# Altium PCB pcb_circuit_de_puissance.PcbDoc
Units mm, origin at the board's own origin, x right, y up, seen from the top; angles counter-clockwise.
Board outline 123 x 48 mm, 2 copper layers (Top Layer, Bottom Layer); 24 components, 18 nets, 80 pads, 73 vias.
Unrouted connection lines stored in the file: 4.
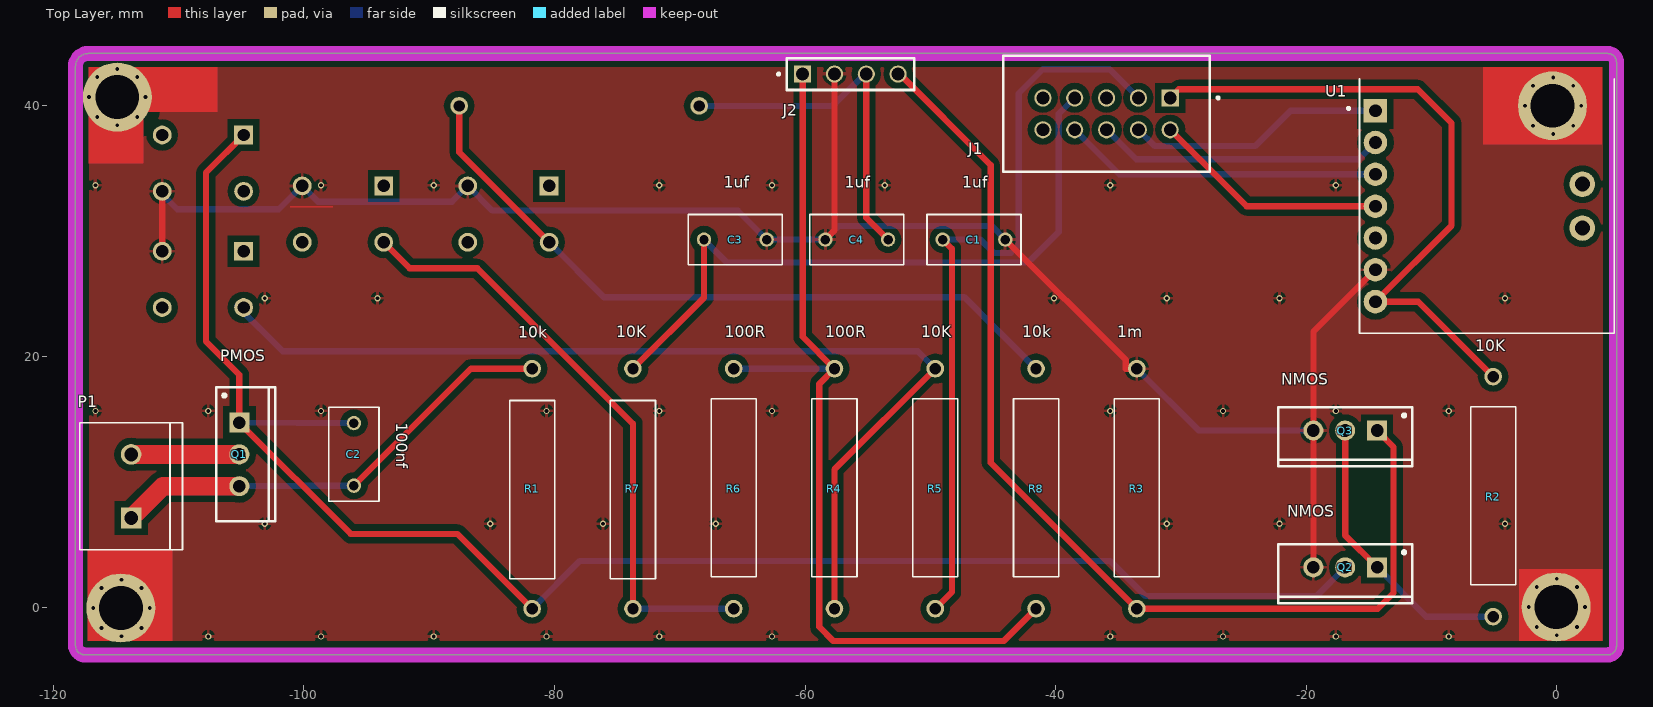
[diagram p0: Top Layer view]
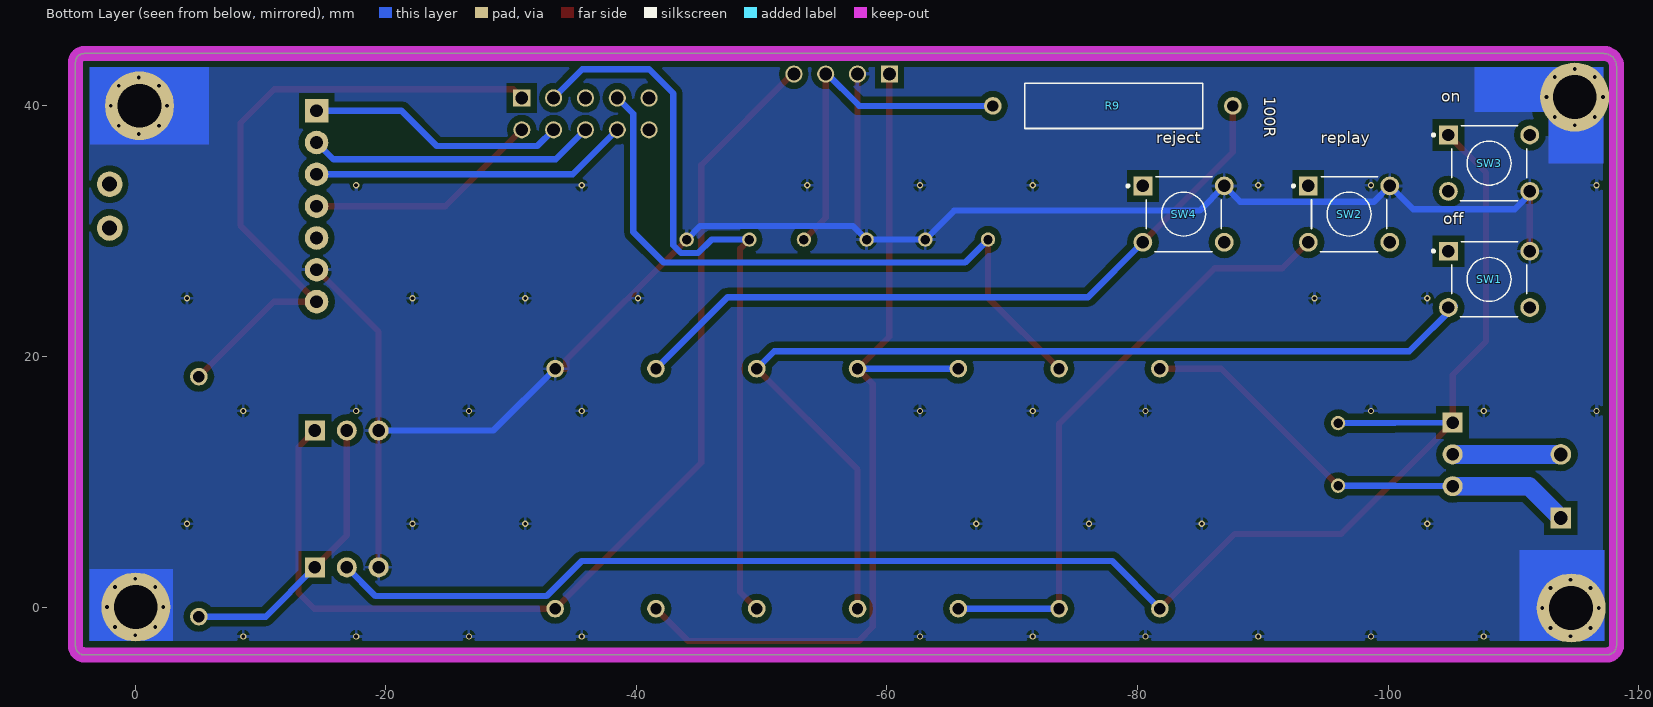
[diagram p1: Bottom Layer view, seen from below]
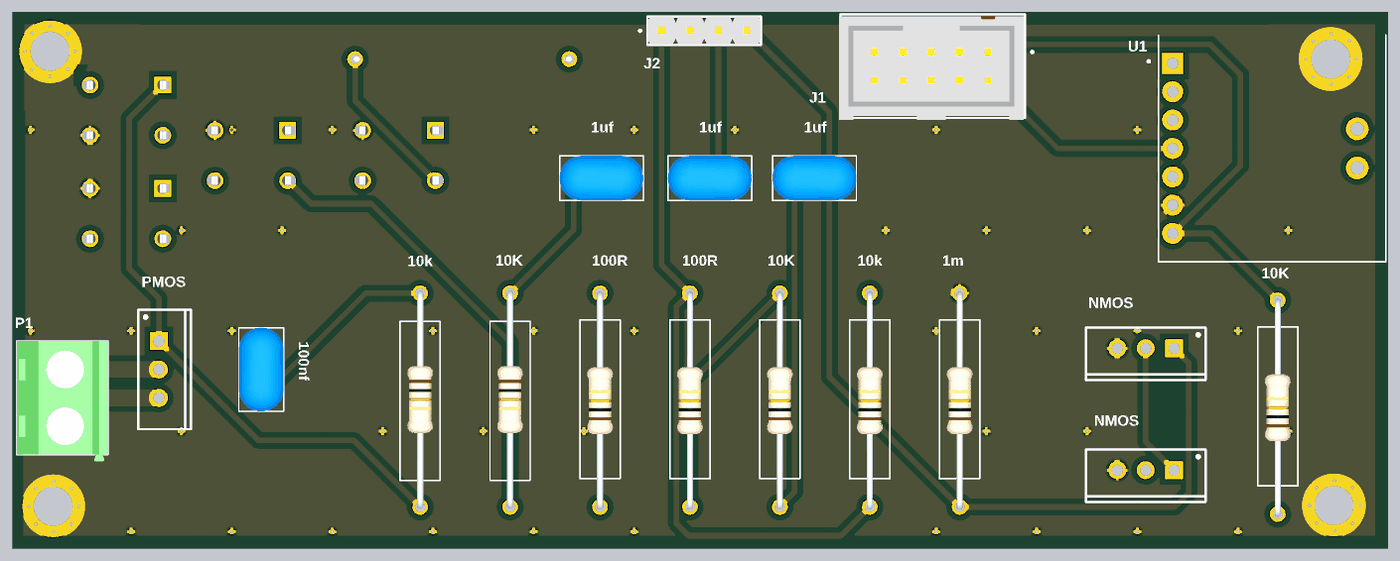
[diagram p2: 3D render of the assembled board from above, using the file's embedded part models]
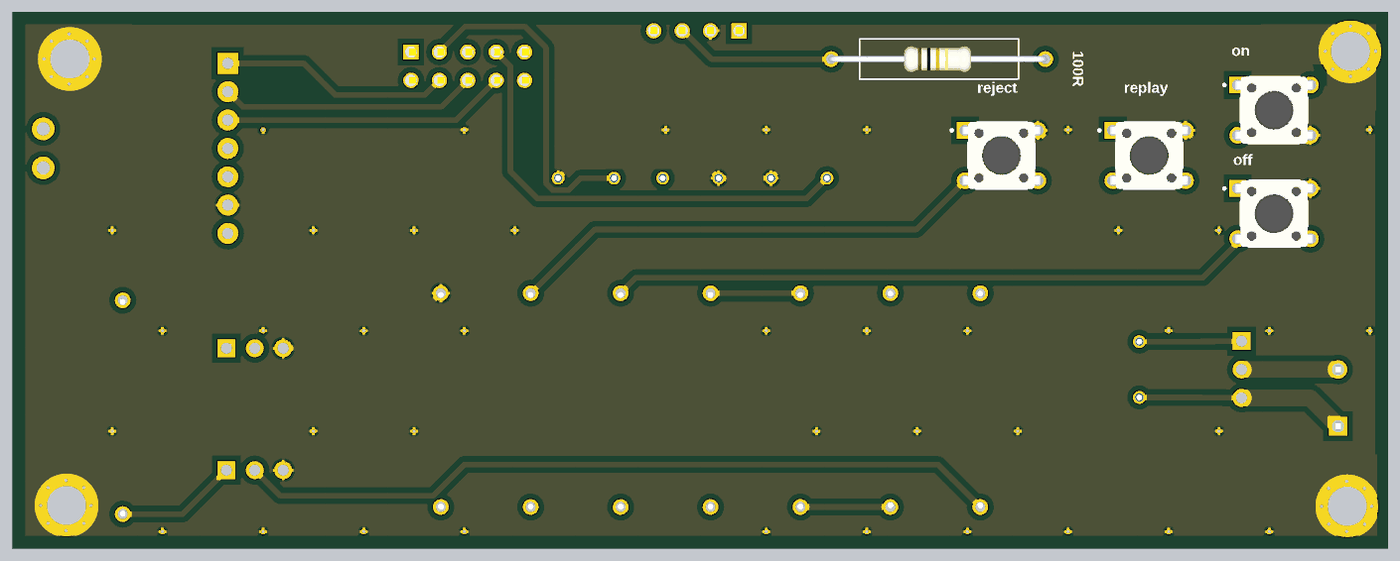
[diagram p3: 3D render of the assembled board from below, using the file's embedded part models]

## Layer stack, top to bottom
Top Solder: solder mask 0.0102, Solder Resist, Dk 3.5
Top Layer: signal copper 0.0356
Dielectric 1: dielectric 0.32, FR-4, Dk 4.8
Bottom Layer: signal copper 0.0356
Bottom Solder: solder mask 0.0102, Solder Resist, Dk 3.5

## Board outline
-118.239,-3.057 ccw(c-117.477,-3.057) -117.477,-3.819 4.062,-3.819 ccw(c4.062,-3.12) 4.761,-3.12 4.761,43.488 ccw(c4.065,43.485) 4.062,44.181 -117.229,44.181 ccw(c-117.229,43.171) -118.239,43.171

## Design rules (kind name [scope] priority, off if disabled: settings)
Clearance Clearance_2 [InNamedPolygon('bottom_polygon')] p1: gap=0.5 ignorepadtopadclearanceinfootprint=FALSE
Clearance Clearance_1 [InNamedPolygon('NONET_L01_P006')] p2: gap=0.5 ignorepadtopadclearanceinfootprint=FALSE
Clearance [InNamedPolygon('NONET_L01_P000')] p3: gap=0.5 ignorepadtopadclearanceinfootprint=FALSE
HoleSize [All] p1: absolutevalues=TRUE maxlimit=3.6 minlimit=0.025 maxpercent=80.000 minpercent=20.000
PolygonConnect [All] p1: connectstyle=Relief reliefconductorwidth=0.254 reliefentries=4 polygonreliefangle="90 Angle" airgapwidth=0.254
RoutingVias [All] p1: holewidth=0.711 width=0.8 viastyle="Through Hole" minholewidth=0.127 minwidth=0.3 maxholewidth=6 maxwidth=8
SilkToSolderMaskClearance [IsPad] p1: minsilkscreentomaskgap=0.23 clearancetoexposedcopper=TRUE
SolderMaskExpansion [All] p1: expansion=0.102 istentingtop=FALSE
UnRoutedNet [All] p1: checkbadconnections=TRUE
Width [All] p1: maxlimit=3 minlimit=0.5 preferedwidth=0.5
27 further rules are at their usual default settings.

## Classes and differential pairs
component class Sheet-circuit_de_puissance: C1 C2 C3 C4 J1 J2 P1 Q1 Q2 Q3 R1 R2 R3 R4 R5 R7 R8 R9 SW1 SW2 SW3 SW4

## Components (designator, comment, footprint, x,y, rotation, side; value= is the part's Value field where it differs from the comment)
C1 "1uf" cap -46.524,29.328 r0 top
C2 "100nf" cap -96.014,12.183 r90 top
C3 "1uf" cap -65.574,29.328 r180 top
C4 "1uf" cap -55.882,29.328 r0 top
J1 "hedear_10p" hedear10p -30.863,40.631 r180 top
J2 "hedear_4p" hedaer_4p_pcb -56.39,42.536 r180 top
P1 "hedear_2p_screw" hedear_2p_screw -113.794,9.643 r90 top
Q1 "PMOS" TO-220AB -105.158,12.183 r270 top
Q2 "NMOS" TO-220AB -16.893,3.166 r180 top
Q3 "NMOS" TO-220AB -16.893,14.088 r180 top
R1 "10k" "resistance - less_top_overlay"#1 -81.79,9.496 r270 top
R2 "10K" "resistance - less_top_overlay"#1 -5.082,8.754 r90 top value=10k
R3 "1m" "resistance - less_top_overlay"#2 -33.53,9.389 r90 top
R4 "100R" "resistance - less_top_overlay"#2 -57.66,9.389 r90 top value=10k
R5 "10K" "resistance - less_top_overlay"#2 -49.617,9.389 r90 top value=100ohm
R6 "100R" "resistance - less_top_overlay"#1 -65.703,9.389 r90 top value=10k
R7 "10K" "resistance - less_top_overlay"#3 -73.747,9.496 r270 top value=100ohm
R8 "10k" "resistance - less_top_overlay"#4 -41.573,9.389 r90 top
R9 "100R" "resistance - less_top_overlay"#1 -77.98,39.996 r180 bottom value=100ohm
SW1 "off" push_button_pcb -108.068,26.153 r180 bottom
SW2 "replay" push_button_pcb -96.892,31.36 r180 bottom
SW3 "on" push_button_pcb -108.068,35.424 r180 bottom
SW4 "reject" push_button_pcb -83.684,31.36 r180 bottom
U1 "DEV14809" MODULEson_DEV14809 -5.59,31.995 r0 top

## Footprints (in the part's own frame and the unit in brackets; to place one, negate y for a bottom-side part, rotate by r counter-clockwise, add the part's x,y. Pads: shape width x height; smd on the part's side, far side on the other; paste and mask are expansions set on the pad)
cap [mm]
  round 1.15 hole 0.75: 1(-2.5,0) 2(2.5,0)
  silkscreen extent -3.75,-2 3.75,2, body extent -3.75,-2 3.75,2, height 23.5
hedaer_4p_pcb [mm]
  rect 1.37x1.37 / inner round 1.37 / far side rect 1.37x1.37 hole 1.02: 01(3.81,0)
  round 1.37 hole 1.02: 02(1.27,0) 03(-1.27,0) 04(-3.81,0)
  silkscreen extent -5.08,-1.27 5.83,1.27, body extent -5.08,-1.27 5.08,1.22, height 6.22
hedear10p [mm]
  rect 1.37x1.37 hole 1.02: 01(0,0)
  round 1.37 hole 1.02: 02(0,2.54) 03(2.54,0) 04(2.54,2.54) 05(5.08,0) 06(5.08,2.54) 07(7.62,0) 08(7.62,2.54) 09(10.16,0) 10(10.16,2.54)
  silkscreen extent -3.93,-3.36 13.33,5.9, body extent -3.05,-3.18 13.46,6.1, height 8.89
hedear_2p_screw [mm]
  rect 1.65x1.65 / inner round 1.65 / far side rect 1.65x1.65 hole 1.1: 1(-2.54,0)
  round 1.65 hole 1.1: 2(2.54,0)
  silkscreen extent -5.08,-4.1 5.08,4.1, body extent -5.68,-4.1 5.08,4.1, height 10
MODULEson_DEV14809 [mil]
  round 80 hole 47.24: J1_1(300,-68.9) J1_2(300,68.9)
  rect 74x74 / inner round 74 / far side rect 74x74 hole 40: J2_1(-350,300)
  round 74 hole 40: J2_2(-350,200) J2_3(-350,100) J2_4(-350,0) J2_5(-350,-100) J2_6(-350,-200) J2_7(-350,-300)
  silkscreen extent -438,-400 400,400
push_button_pcb [mm]
  rect 1.498x1.498 / inner round 1.498 / far side rect 1.498x1.498 hole 0.99: 1(-3.25,2.25)
  round 1.498 hole 0.99: 2(3.25,2.25) 3(-3.25,-2.25) 4(3.25,-2.25)
  silkscreen extent -4.54,-3 3,3, body extent -3.9,-3 3.9,3, height 5.01
"resistance - less_top_overlay"#1 [mm]
  round 1.408 hole 0.9: 1(-9.525,0) 2(9.632,0)
  silkscreen extent -6.98,-1.8 7.24,1.8, body extent -9.76,-1.15 9.76,1.15, height 2.3
"resistance - less_top_overlay"#2 [mm]
  oval 1.4x1.408 hole 0.9: 1(-9.525,0)
  round 1.408 hole 0.9: 2(9.632,0)
  silkscreen extent -6.98,-1.8 7.24,1.8, body extent -9.76,-1.15 9.76,1.15, height 2.3
"resistance - less_top_overlay"#3 [mm]
  round 1.4 hole 0.9: 1(-9.525,0) 2(9.632,0)
  silkscreen extent -6.98,-1.8 7.24,1.8, body extent -9.76,-1.15 9.76,1.15, height 2.3
"resistance - less_top_overlay"#4 [mm]
  oval 1.4x1.408 hole 0.9: 1(-9.525,0) 2(9.632,0)
  silkscreen extent -6.98,-1.8 7.24,1.8, body extent -9.76,-1.15 9.76,1.15, height 2.3
TO-220AB [mm] "TO, Thru-Hole, Vertical, Heatsink Mounted; 3 In-Line Leads; Pitch 2.54 mm"
  rect 1.6x1.6 hole 1: 1(-2.54,0)
  round 1.6 hole 1: 2(0,0) 3(2.54,0)
  silkscreen extent -5.35,-1.85 5.35,2.85, body extent -5.4,-1.9 5.4,2.9, height 19.3

## Part data
C1 C2 C3 C4: library part cap, "Lead Capacitor X7R_EIA_ with Capacitance: 0.10F and Rated Voltage: 1000Vdc", Package="Radial Murata", Availability=Unavailable, MF=Murata, MP=RDER73A104K5E1H03A, Price=None, SnapEDA_Link=https://www.snapeda.com/parts/RDER73A104K5E1H03A/Murata/view-part/4545952/?ref=snap
J1 J2 P1: Package=None, Price=None
  J1: Availability=Unavailable, MP=TSS-105-02-L-D
  J2: Availability=Unavailable, MP=MTSW-104-11-G-S-340
  P1: Availability="In Stock", Check_prices=https://www.snapeda.com/parts/282837-2/TE+Connectivity+AMP+Connectors/view-part/?ref=eda, MF="TE Connectivity", MP=282837-2, Purchase-URL=https://pricing.snapeda.com/search/part/282837-2/?ref=eda, SnapEDA_Link=https://www.snapeda.com/parts/282837-2/TE+Connectivity+AMP+Connectors/view-part/?ref=snap
Q1: library part PMOS-2, "P-Channel Power MOSFET", ComponentLink1Description="Manufacturer Link", ComponentLink1URL=http://www.irf.com/, DatasheetVersion=PD-9.390D, LatestRevisionDate=17-Jul-2002, LatestRevisionNote="Re-released for DXP Platform.", Note="Pin 4 not drawn and electrically connected to Pin 2.", PackageDescription="TO, Thru-Hole, Vertical, Heatsink Mounted; 3 In-Line Leads; Pitch 2.54 mm", PackageReference=TO-220AB, PackageVersion=Feb-1997, Published=8-Jun-2000, Publisher="Altium Limited"
Q2 Q3: library part NMOS-2, "N-Channel Power MOSFET", ComponentLink1Description="Manufacturer Link", ComponentLink1URL=http://www.irf.com/, DatasheetVersion=PD-9.814, LatestRevisionDate=17-Jul-2002, LatestRevisionNote="Re-released for DXP Platform.", Note="Pin 2 is electrically connected to pin 4.", PackageDescription="TO, Thru-Hole, Vertical, Heatsink Mounted; 3 In-Line Leads; Pitch 2.54 mm", PackageReference=TO-220AB, PackageVersion=Feb-1997, Published=8-Jun-2000, Publisher="Altium Limited"
R1 R2 R3 R4 R5 R6 R7 R8 R9: library part resistance, Package="Axial TE Connectivity / AMP", Availability="In Stock", Check_prices=https://www.snapeda.com/parts/CBT50J5R1/TE+Connectivity+%252F+AMP/view-part/?ref=eda, MF="TE Connectivity / AMP", MP=CBT50J5R1, Price=None, Purchase-URL=https://pricing.snapeda.com/search/part/CBT50J5R1/?ref=eda, SnapEDA_Link=https://www.snapeda.com/parts/CBT50J5R1/TE+Connectivity+%252F+AMP/view-part/?ref=snap
SW1 SW2 SW3 SW4: library part push_button, "Switch Push Button OFF (ON) SPST Round Button 0.05A 24VDC Momentary Contact PC Pins Thru-Hole", Package=None, Check_prices=https://www.snapeda.com/parts/1825910-6/TE+Connectivity+ALCOSWITCH+Switches/view-part/?ref=eda, Digi-Key_Part_Number=450-1650-ND, MF="TE Connectivity", MP=1825910-6, Purchase-URL=https://pricing.snapeda.com/search/part/1825910-6/?ref=eda, SnapEDA_Link=https://www.snapeda.com/parts/1825910-6/TE+Connectivity+ALCOSWITCH+Switches/view-part/?ref=snap
U1: "MAX98357A Audio Interface Audio - Platform Evaluation Expansion Board", Package=None, Check_prices=https://www.snapeda.com/parts/DEV14809/SparkFun+Electronics/view-part/?ref=eda, MF="Sparkfun Electronics", MP=DEV14809, SnapEDA_Link=https://www.snapeda.com/parts/DEV14809/SparkFun+Electronics/view-part/?ref=snap

## Free pads (board coordinates)
  round 5.5 hole 3.5: 1(-114.618,-0.077) 2(-114.9,40.7) 3(-0.35,40.006) 4(-0.054,0)

## Via types
v1: diameter 0.5, hole 0.3, Top Layer to Bottom Layer, 41 vias
v2: diameter 0.3, hole 0.3, Top Layer to Bottom Layer, 28 vias
v3: diameter 0.4, hole 0.3, Top Layer to Bottom Layer, 4 vias

## Nets (pads, with @x,y where several pads share a name; then routed paths per layer and width w, separated by ;. In a path a pad name is that pad's centre, name@x,y a point inside that pad or via, vN(x,y) a via of type N, cw(c..) or ccw(c..) an arc to the next point about the centre after c; other vN are vias at no path point)
+3.3v: J2.01 R4.2 R6.2 R8.1 | length 72.7
  Top Layer w0.5: J2.01@-60.2,42.663 -60.2,21.561 R4.2 -58.879,17.802 -58.879,-1.584 -57.748,-2.715 -44.152,-2.715 R8.1
  Bottom Layer w0.5: R6.2 R4.2
+5V: J1.01 R2.2 U1.J2_7 | length 52.5
  Top Layer w0.5: J1.01 -30.177,41.317 -11.102,41.317 -8.407,38.622 -8.407,30.448 U1.J2_7 -11.071,24.375 R2.2
BCLK: J1.06 U1.J2_2 | length 23
  Bottom Layer w0.5: J1.06 -33.581,35.729 -15.826,35.729 U1.J2_2
close_nmos: Q2.1 Q3.2 R2.1 | length 22.9
  Top Layer w0.5: Q3.2 -16.893,5.706 Q2.1
  Bottom Layer w0.5: Q2.1 -10.416,-0.771 R2.1
close_signal: J2.04 Q3.1 R3.1 | length 85.2
  Top Layer w0.5: J2.04@-52.58,42.663 -45.189,35.272 -45.189,11.523 R3.1 -14.302,-0.136 -13.032,1.134 -13.032,12.767 Q3.1
DOUT: J1.08 U1.J2_3 | length 25.5
  Bottom Layer w0.5: J1.08 -34.927,34.535 U1.J2_3
GND: C1.2 C3.1 C4.1 J2.02 pad.1 pad.2 pad.3 pad.4 Q2.3 Q3.3 R3.2 SW1.2 SW2.2 SW3.4 SW4.2 U1.J2_6 | length 148
  Top Layer w0.5: SW1.2 SW3.4 ; C4.1 -57.66,30.05 J2.02@-57.66,42.663 ; C1.2 -34.419,19.723 -34.419,19.021 R3.2 ; Q2.3 Q3.3 -19.433,21.962 U1.J2_6
  Bottom Layer w0.5: SW3.4 -111.318,32.948 -110.111,31.741 -102.011,31.741 SW2.2 -98.883,32.351 -88.193,32.351 SW4.2 -84.963,31.639 -65.385,31.639 C3.1 C4.1 -57.29,30.42 -45.116,30.42 C1.2 ; R3.2 -28.597,14.088 Q3.3
  other v1: -107.639,-2.346 -98.639,-2.346 -89.639,-2.346 -80.639,-2.346 -71.639,-2.346 -62.639,-2.346 -35.639,-2.346 -26.639,-2.346 -17.639,-2.346 -8.639,-2.346 -103.139,6.654 -85.139,6.654 -76.139,6.654 -67.139,6.654 -31.139,6.654 -22.139,6.654 -4.139,6.654 -116.639,15.654 -107.639,15.654 -98.639,15.654 -80.639,15.654 -71.639,15.654 -62.639,15.654 -35.639,15.654 -26.639,15.654 -17.639,15.654 -8.639,15.654 -103.139,24.654 -94.139,24.654 -40.139,24.654 -31.139,24.654 -22.139,24.654 -4.139,24.654 -116.639,33.654 -98.639,33.654 -89.639,33.654 -71.639,33.654 -62.639,33.654 -53.639,33.654 -35.639,33.654 -17.639,33.654
  other v2: -114.564,-2.327 0,-2.25 -116.164,-1.677 -112.964,-1.677 -1.6,-1.6 1.6,-1.6 -116.814,-0.077 -112.314,-0.077 -2.25,0 2.25,0 -116.164,1.523 -112.964,1.523 -1.6,1.6 1.6,1.6 -0.296,37.756 -1.896,38.406 1.304,38.406 -114.909,38.452 -116.509,39.102 -113.309,39.102 -2.546,40.006 1.954,40.006 -117.159,40.702 -112.659,40.702 -1.896,41.606 1.304,41.606 -116.509,42.302 -113.309,42.302
  other v3: -114.564,2.173 0,2.25 -0.296,42.256 -114.909,42.952
hold_pmos: C2.2 Q1.1 Q2.2 R1.2 SW3.1 | length 132.8
  Top Layer w0.5: SW3.1@-104.67,37.822 -107.825,34.667 -107.825,21.2 -105.158,18.533 Q1.1 -96.268,5.833 -87.759,5.833 R1.2
  Bottom Layer w0.5: Q1.1 -100.546,14.683 C2.2 ; R1.2 -77.98,3.674 -35.632,3.674 -32.838,0.88 -19.179,0.88 Q2.2
LRC: J1.04 U1.J2_1 | length 20.6
  Bottom Layer w0.5: J1.04 -32.108,36.796 -24.081,36.796 -21.262,39.615 U1.J2_1
NetC1_1: C1.1 J1.03 R5.1 | length 60.5
  Top Layer w0.5: R5.1 -48.287,1.193 -48.287,28.591 C1.1
  Bottom Layer w0.5: C1.1 -46.001,29.328 -44.922,28.249 -43.577,28.249 -42.945,28.881 -42.945,40.995 -41.023,42.917 -35.689,42.917 J1.03
NetC2_1: C2.1 P1.1 Q1.3 R1.1 | length 27.2
  Top Layer w0.5: C2.1 -86.676,19.021 R1.1
  Bottom Layer w0.5: Q1.3 -100.546,9.683 C2.1
NetC3_2: C3.2 J1.07 R7.1 | length 54
  Top Layer w0.5: R7.1 -68.074,24.694 C3.2
  Bottom Layer w0.5: C3.2 -66.241,27.495 -42.191,27.495 -39.753,29.933 -39.753,39.361 J1.07
NetC4_2: C4.2 J2.03 R9.1 | length 28.5
  Top Layer w0.5: J2.03@-55.12,42.663 -55.12,31.066 C4.2
  Bottom Layer w0.5: R9.1 -57.787,39.996 J2.03@-55.12,42.663
NetJ1_02: J1.02 U1.J2_4 | length 18.9
  Top Layer w0.5: J1.02 -24.767,31.995 U1.J2_4
NetR4_1: R4.1 R5.2 SW1.3 | length 80.3
  Top Layer w0.5: R4.1 -57.66,10.978 R5.2
  Bottom Layer w0.5: SW1.3@-105.319,24.029 -101.704,20.413 -51.008,20.413 R5.2
NetR6_1: R6.1 R7.2 SW2.3 | length 48.7
  Top Layer w0.5: SW2.3 -91.574,27.042 -86.159,27.042 -73.747,14.63 R7.2
  Bottom Layer w0.5: R7.2 R6.1
NetR8_2: R8.2 R9.2 SW4.3 | length 56.9
  Top Layer w0.5: R9.2 -87.612,36.288 SW4.3
  Bottom Layer w0.5: SW4.3 -76.055,24.731 -47.283,24.731 R8.2
power_in: P1.2 Q1.2
pads on no net: J1.05 J1.09 J1.10 SW1.1 SW1.4 SW2.1 SW2.4 SW3.2 SW3.3 SW4.1 SW4.4 U1.J1_1 U1.J1_2 U1.J2_5

## Polygon pours and split planes (outlines as drawn)
GND on Top Layer "top_polygon" (solid, remove dead copper, pour order 2): -118.239,-3.057 ccw(c-117.477,-3.057) -117.477,-3.819 4.062,-3.819 ccw(c4.062,-3.12) 4.761,-3.12 4.761,43.488 ccw(c4.065,43.485) 4.062,44.181 -117.229,44.181 ccw(c-117.229,43.171) -118.239,43.171
GND on Top Layer "GND_L01_P008" (solid, pour order 8): -101.107,31.963 -97.707,31.963 -97.687,31.943
GND on Bottom Layer "bottom_polygon" (solid, remove dead copper, pour order 7): -118.239,-3.057 ccw(c-117.477,-3.057) -117.477,-3.819 4.062,-3.819 ccw(c4.062,-3.12) 4.761,-3.12 4.761,43.488 ccw(c4.065,43.485) 4.062,44.181 -117.229,44.181 ccw(c-117.229,43.171) -118.239,43.171

## Keep-outs
Keep-Out Layer:
  lines w1.2: 4.761,43.488 ccw(c4.065,43.485) 4.062,44.181 -117.229,44.181 ccw(c-117.229,43.171) -118.239,43.171 -118.239,-3.057 ccw(c-117.477,-3.057) -117.477,-3.819 4.062,-3.819 ccw(c4.062,-3.12) 4.761,-3.12 4.761,43.488 ; 4.761,43.488 4.761,43.488

## Other copper
Multi-Layer:
  rectangle net GND: -117.267,-2.7 -110.5,4.563
  rectangle net GND: -116.3,39.522 -106.889,43.1
  rectangle net GND: -117.2,35.4 -112.8,43.1
  rectangle net GND: -3.032,-2.71 3.652,3.032
  rectangle net GND: -5.9,36.9 3.6,43.1
  lines w1.5 net NetC2_1: -113.794,7.103 -111.254,9.643 -105.158,9.643
  lines w1.5 net power_in: -113.794,12.183 -105.158,12.183